# Altium PCB pyboardCN_V2.PcbDoc
Units mil, origin at the board's own origin, x right, y up, seen from the top; angles counter-clockwise.
Board outline 2125.98 x 1732.28 mil, 2 copper layers (Top Layer, Bottom Layer); 62 components, 71 nets, 312 pads, 93 vias.
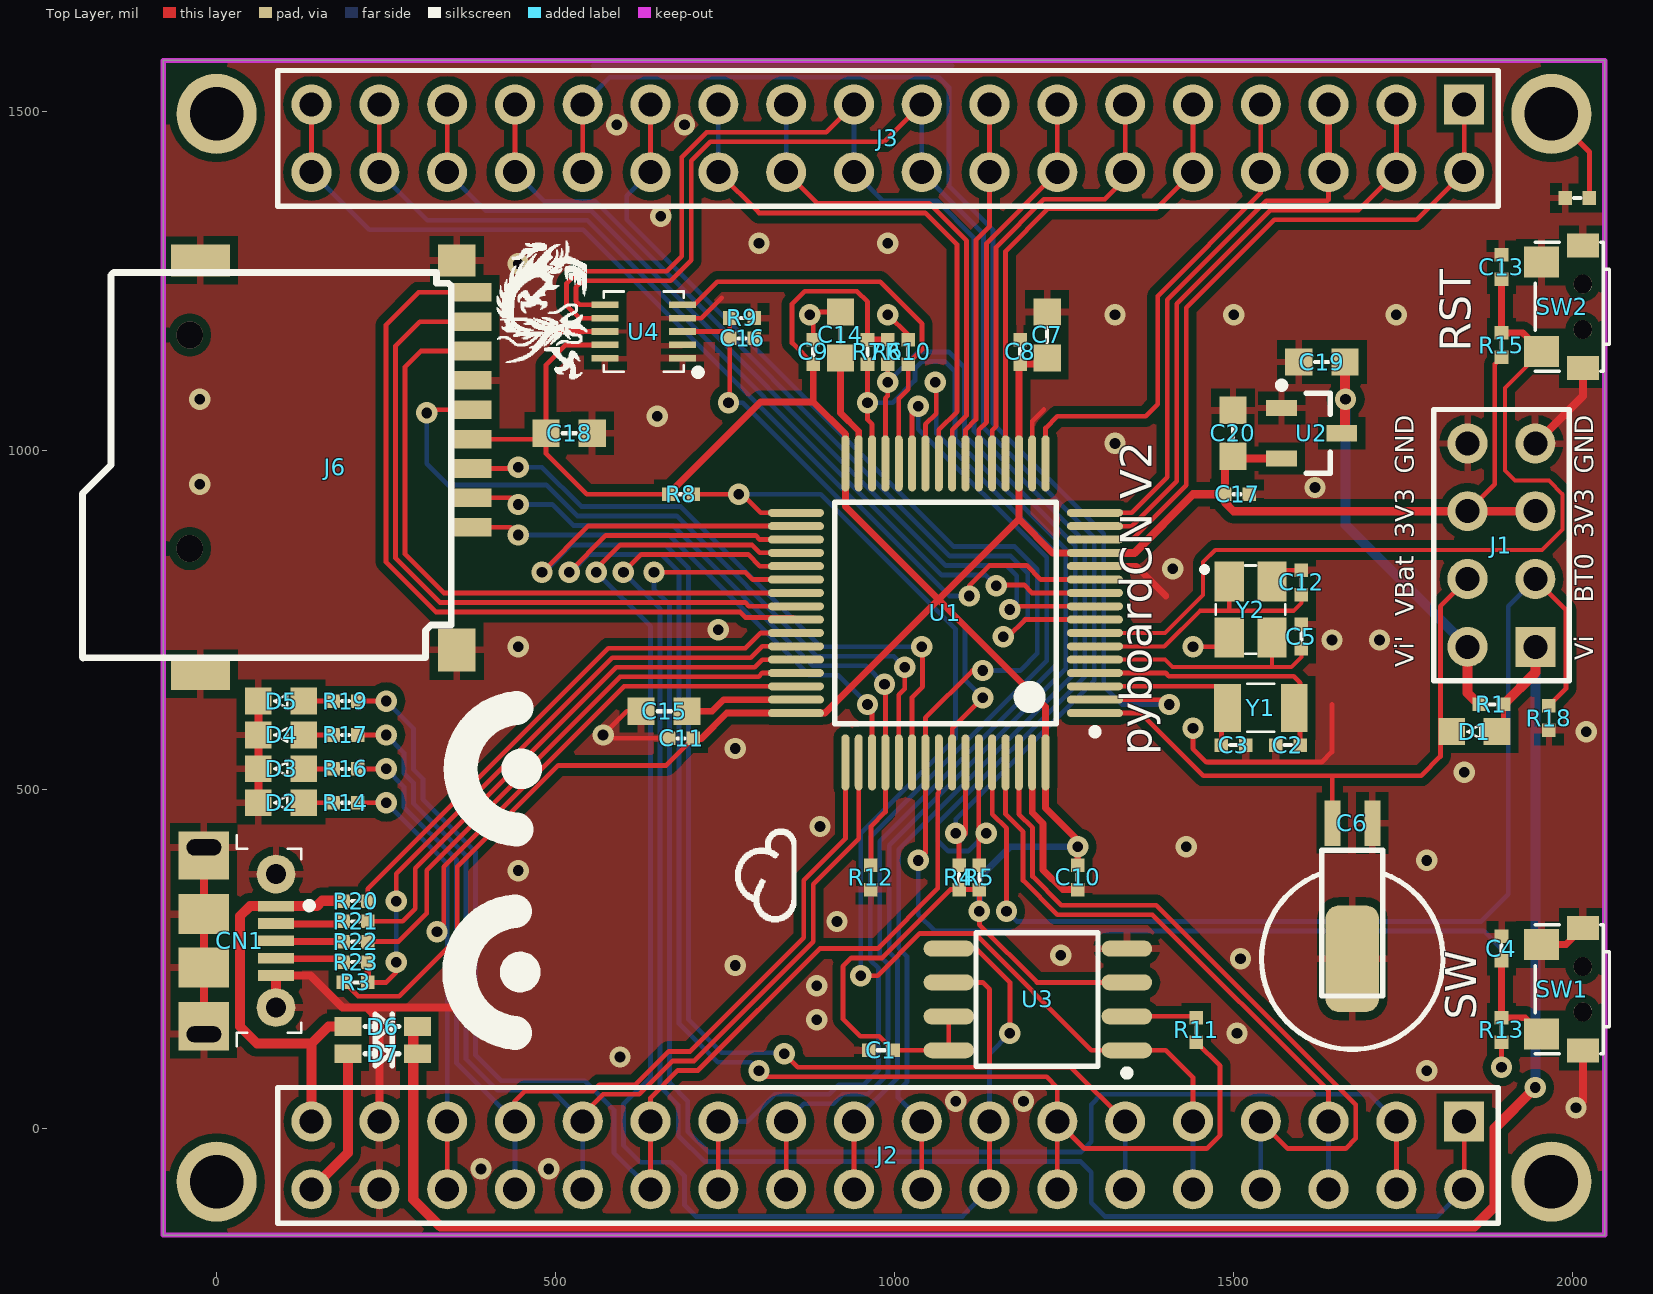
[diagram p0: Top Layer view]
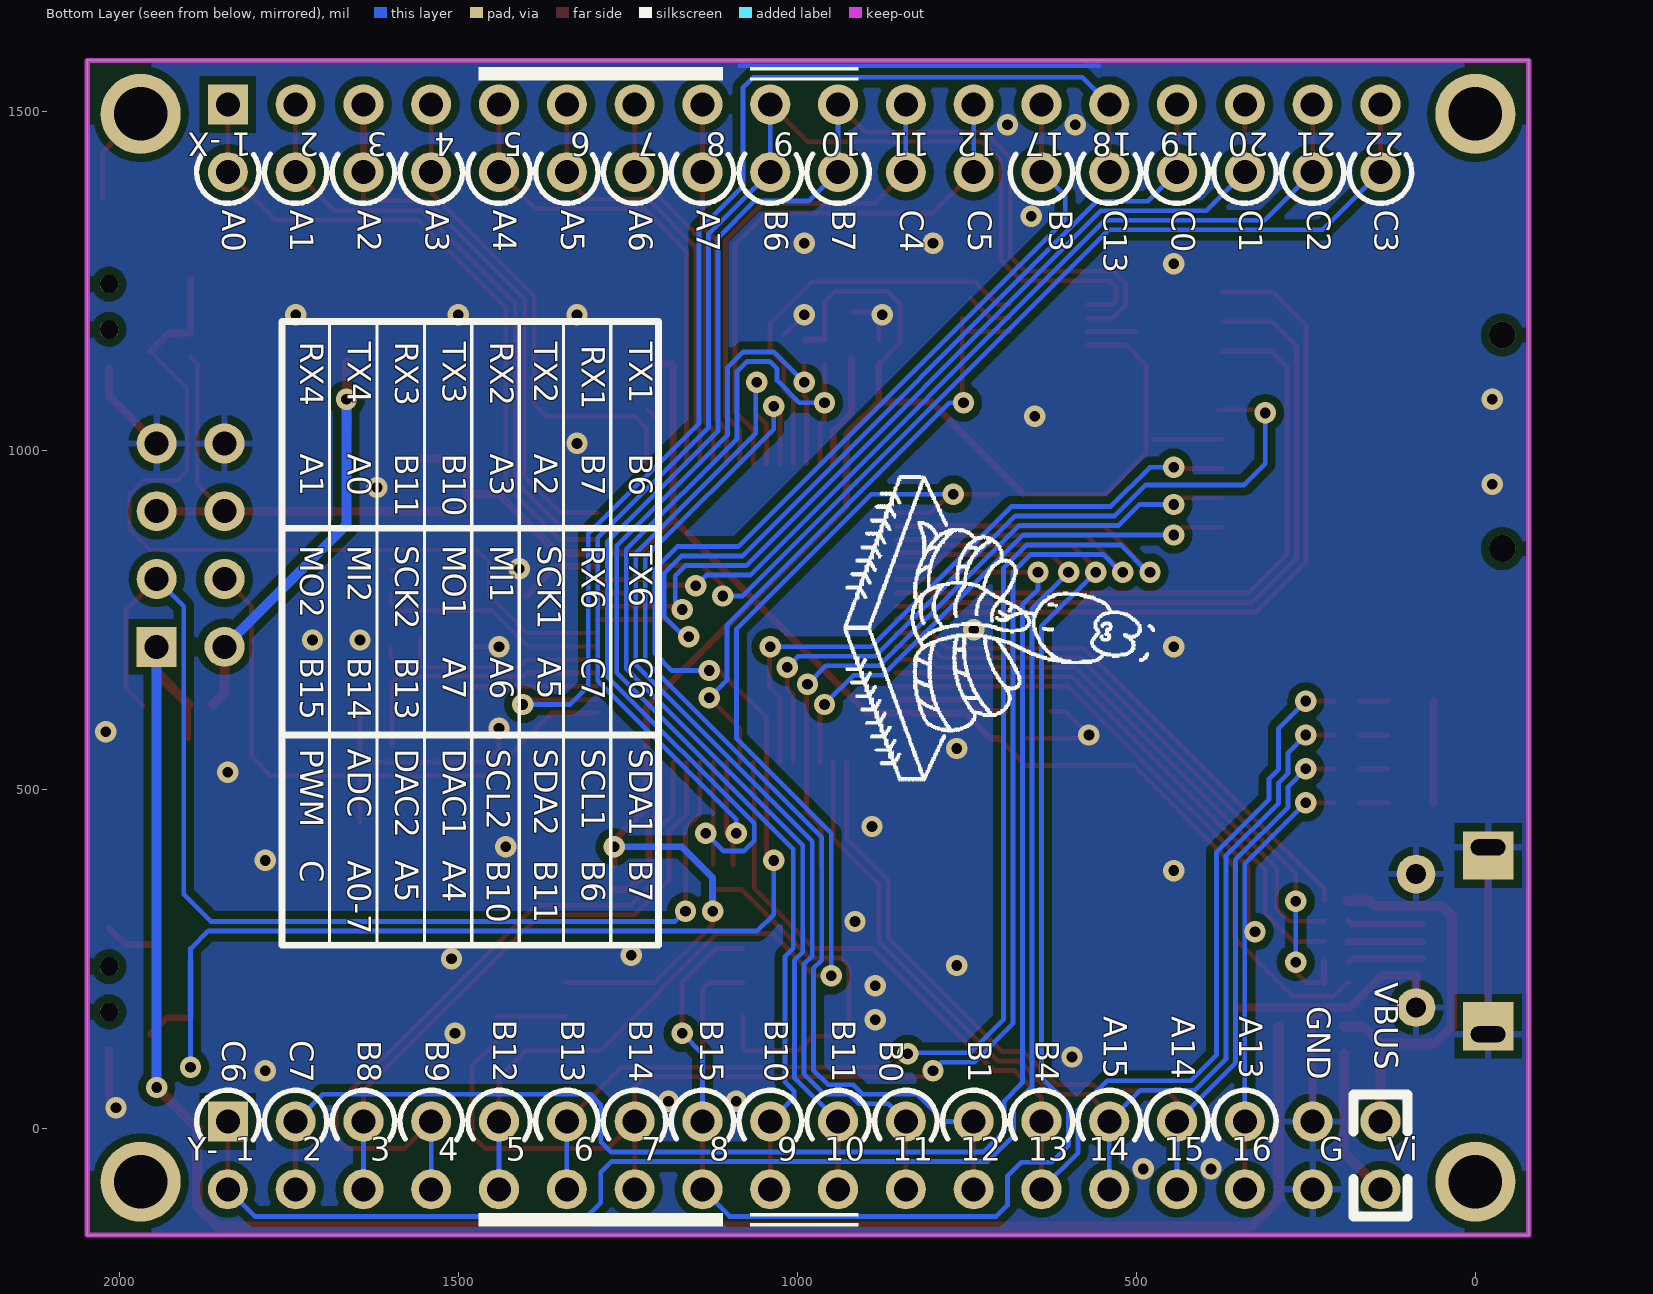
[diagram p1: Bottom Layer view, seen from below]

## Layer stack, top to bottom
Top Layer: signal copper 1.4
Dielectric: dielectric 12.6, FR-4, Dk 4.8
Bottom Layer: signal copper 1.4

## Board outline
-78.74,-157.48 -78.74,1574.8 2047.24,1574.8 2047.24,-157.48

## Design rules (kind name [scope] priority, off if disabled: settings)
Clearance Clearance_keepout [OnLayer('Keep-Out Layer')] p1: gap=0
Clearance Clearance_polygon [InPolygon] p2: gap=12
Clearance [All] p3: gap=7
ComponentClearance [All] p1 off: gap=10 collisioncheckmode=3 verticalgap=10 showdistances=FALSE
MinimumSolderMaskSliver [All] p1 off: minsoldermaskwidth=10
NetAntennae [All] p1 off: netantennaetolerance=0
PolygonConnect PolygonConnect_via [IsVia] p1: connectstyle=Direct reliefconductorwidth=10 reliefentries=4 polygonreliefangle="90 Angle"
PolygonConnect [All] p2: connectstyle=Relief reliefconductorwidth=10 reliefentries=4 polygonreliefangle="90 Angle"
RoomDefinition 电源 [InComponentClass('电源')] p1: confinementstyle=ConfineIn formatcopy=TRUE lockcomponents=FA outline 1795,1280 -170,1280 -170,20 1795,20
RoomDefinition 接口 [InComponentClass('接口')] p2: confinementstyle=ConfineIn formatcopy=TRUE lockcomponents=FA outline 2015,1635 35,1635 35,-210 2015,-210
RoomDefinition STM32F405 [InComponentClass('STM32F405')] p3: confinementstyle=ConfineIn formatcopy=TRUE lockcomponents=FALSE outline 2110,1605 -150,1605 -150,-180 2110,-180
RoomDefinition "micro SD" [InComponentClass('micro SD')] p4: confinementstyle=ConfineIn formatcopy=TRUE lockcomponents=FALSE outline 595,1356.06 -209.17,1356.06 -209.17,571.18 595,571.18
RoutingVias [All] p1: holewidth=28 width=50 viastyle="Through Hole" minholewidth=15.75 minwidth=31.5 maxholewidth=28 maxwidth=50
SilkscreenOverComponentPads [All] p1 off: minsilkscreentomaskgap=10
SolderMaskExpansion [All] p1 off: expansion=4
Width [All] p1: maxlimit=30 minlimit=6 preferedwidth=10
24 further rules are at their usual default settings.

## Classes and differential pairs
component class "micro SD": C18 J6
component class STM32F405: C1 C2 C3 C4 C5 C6 C7 C8 C9 C10 C11 C12 C13 C14 C15 C16 C17 D1 D2 D3 D4 D5 R3 R4 R5 R6 R7 R8 R9 R10 R11 R12 R13 R14 R15 R16 R17 R18 R19 SW1 SW2 U1 U3 U4 Y1 Y2
component class 接口: D7 J1 J2 J3 R1
component class 电源: C19 C20 CN1 D6 R20 R21 R22 R23 U2

## Components (designator, comment, footprint, x,y, rotation, side; value= is the part's Value field where it differs from the comment)
C1 "104" SMD0402 980,115 r0 top
C2 "2.2p" SMD0402 1580,565 r0 top
C3 "2.2p" SMD0402 1500,565 r180 top
C4 "104" SMD0402 1895,265 r270 top
C5 "18p" SMD0402 1600,725 r270 top
C6 "0.22F" DMS3R3224R 1675,250 r0 top
C7 "2u2" SMD0603 1225,1170 r270 top
C8 "104" SMD0402 1185,1145 r270 top
C9 "104" SMD0402 880,1145 r270 top
C10 "104" SMD0402 1270,370 r90 top
C11 "104" SMD0402 685,575 r0 top
C12 "18p" SMD0402 1600,805 r270 top
C13 "104" SMD0402 1895,1270 r270 top
C14 "2u2" SMD0603 920,1170 r270 top
C15 "2u2" SMD0603 660,615 r0 top
C16 "104" SMD0402 775,1165 r180 top
C17 "104" SMD0402 1505,935 r180 top
C18 "2u2" SMD0603 520,1025 r180 top
C19 "2u2" SMD0603 1630,1130 r0 top
C20 "2u2" SMD0603 1499,1025 r270 top
CN1 "1050170001" MOLEX_1050170001 87.56,276.43 r270 top
D1 "LED RED" LED_0603_RED 1855,585 r90 top
D2 "LED RED" LED_0603_RED 95,480 r90 top
D3 "LED GREEN" LED_0603_GREEN 95,530 r90 top
D4 "LED Yellow" LED_0603_YELLOW 95,580 r90 top
D5 "LED Blue" LED_0603_BLUE 95,630 r90 top
D6 "SS5819WS" 1N5819-SOD323 245,150 r0 top
D7 "SS5819WS" 1N5819-SOD323 245,110 r0 top
J1 "" HDR2X4 1945,710 r90 top
J2 "Header 18X2" HDR2X18 1840,10 r180 top
J3 "Header 18X2" HDR2X18 1840,1510 r180 top
J6 "microSD PUSH-PULL" microSD-1 175,975 r180 top
R1 "1" SMD0402 1880,625 r180 top
R3 "100k" SMD0402 205,215 r0 top
R4 "10k" SMD0402 1095,370 r90 top
R5 "10k" SMD0402 1125,370 r90 top
R6 "10k" SMD0402 990,1145 r270 top
R7 "10k" SMD0402 960,1145 r270 top
R8 "10k" SMD0402 685,935 r0 top
R9 "10k" SMD0402 775,1195 r0 top
R10 "10k" SMD0402 1020,1145 r90 top
R11 "470" SMD0402 1445,145 r270 top
R12 "10M" SMD0402 965,370 r270 top
R13 "10k" SMD0402 1895,145 r270 top
R14 "1k" SMD0402 190,480 r180 top
R15 "10k" SMD0402 1895,1155 r270 top
R16 "1k" SMD0402 190,530 r180 top
R17 "1k" SMD0402 190,580 r180 top
R18 "100k" SMD0402 1965,605 r90 top
R19 "1k" SMD0402 190,630 r180 top
R20 "560" SMD0402 205,335 r180 top
R21 "22R" SMD0402 205,305 r180 top
R22 "22R" SMD0402 205,275 r180 top
R23 "560" SMD0402 205,245 r180 top
SW1 "USR" SWPB_2x4_L 2015,205 r270 top
SW2 "RST" SWPB_2x4_L 2015,1211.54 r270 top
U1 "STM32F405RGT6" LQFP64_M 1075,760 r180 top
U2 "XC6206P332MR" SOT-23_N 1615,1025 r0 top
U3 "W25Q64" SO8_L 1250,190 r180 top
U4 "MMA7660FC" MMA7660 630,1175 r180 top
Y1 "32K" TXC_9H03200019 1540,620 r180 top
Y2 "8M" SMD3225 1525,765 r270 top

## Footprints (in the part's own frame and the unit in brackets; to place one, negate y for a bottom-side part, rotate by r counter-clockwise, add the part's x,y. Pads: shape width x height; smd on the part's side, far side on the other; paste and mask are expansions set on the pad)
1N5819-SOD323 [mm]
  rect 1x0.7 smd: 1(-1.3,0) 2(1.3,0)
  silkscreen extent -0.66,-0.46 0.61,0.46, body extent -1.3,-0.63 1.3,0.63, height 0.85
DMS3R3224R [mm]
  rect 0.6x1.7 smd: 1(-0.75,5.08) 2(0.75,5.08)
  silkscreen extent -3.4,-3.4 3.4,4.06, body extent -3.27,-3.29 3.3,5.6, height 1.6
HDR2X4 [mm] "Connector; Header; 4"
  rect 1.5x1.5 hole 0.9: 1(0,0)
  round 1.5 hole 0.9: 2(0,2.54) 3(2.54,0) 4(2.54,2.54) 5(5.08,0) 6(5.08,2.54) 7(7.62,0) 8(7.62,2.54)
  silkscreen extent -1.27,-1.27 8.89,3.81
HDR2X18 [mm] "Connector; Header; 18x2 P"
  rect 1.5x1.5 hole 0.9: 1(0,0)
  round 1.5 hole 0.9: 2(0,2.54) 3(2.54,0) 4(2.54,2.54) 5(5.08,0) 6(5.08,2.54) 7(7.62,0) 8(7.62,2.54) 9(10.16,0) 10(10.16,2.54) 11(12.7,0) 12(12.7,2.54) 13(15.24,0) 14(15.24,2.54) 15(17.78,0) 16(17.78,2.54) 17(20.32,0) 18(20.32,2.54) 19(22.86,0) 20(22.86,2.54) 21(25.4,0) 22(25.4,2.54) 23(27.94,0) 24(27.94,2.54) 25(30.48,0) 26(30.48,2.54) 27(33.02,0) 28(33.02,2.54) 29(35.56,0) 30(35.56,2.54) 31(38.1,0) 32(38.1,2.54) 33(40.64,0) 34(40.64,2.54) 35(43.18,0) 36(43.18,2.54)
  silkscreen extent -1.27,-1.27 44.45,3.81
LED_0603_BLUE [mm]
  rect 1x1 smd paste+0 mask+0: 1(0,-0.85) 2(0,0.85)
  silkscreen extent -0.25,-0.23 0.25,0.25, body extent -0.38,-0.76 0.38,0.76, height 0.8
LED_0603_GREEN [mm]
  rect 1x1 smd paste+0 mask+0: 1(0,-0.85) 2(0,0.85)
  silkscreen extent -0.25,-0.23 0.25,0.25, body extent -0.38,-0.76 0.38,0.76, height 0.8
LED_0603_RED [mm]
  rect 1x1 smd paste+0 mask+0: 1(0,-0.85) 2(0,0.85)
  silkscreen extent -0.25,-0.23 0.25,0.25, body extent -0.38,-0.76 0.38,0.76, height 0.8
LED_0603_YELLOW [mm]
  rect 1x1 smd paste+0 mask+0: 1(0,-0.85) 2(0,0.85)
  silkscreen extent -0.25,-0.23 0.25,0.25, body extent -0.38,-0.76 0.38,0.76, height 0.8
LQFP64_M [mm] "Thin QFP, 64-Leads, Body 10x10mm, Pitch 0.5mm, IPC Low Density"
  oval 2.1x0.3 smd: 1(-5.6,3.75) 2(-5.6,3.25) 3(-5.6,2.75) 4(-5.6,2.25) 5(-5.6,1.75) 6(-5.6,1.25) 7(-5.6,0.75) 8(-5.6,0.25) 9(-5.6,-0.25) 10(-5.6,-0.75) 11(-5.6,-1.25) 12(-5.6,-1.75) 13(-5.6,-2.25) 14(-5.6,-2.75) 15(-5.6,-3.25) 16(-5.6,-3.75) 33(5.6,-3.75) 34(5.6,-3.25) 35(5.6,-2.75) 36(5.6,-2.25) 37(5.6,-1.75) 38(5.6,-1.25) 39(5.6,-0.75) 40(5.6,-0.25) 41(5.6,0.25) 42(5.6,0.75) 43(5.6,1.25) 44(5.6,1.75) 45(5.6,2.25) 46(5.6,2.75) 47(5.6,3.25) 48(5.6,3.75)
  oval 0.3x2.1 smd: 17(-3.75,-5.6) 18(-3.25,-5.6) 19(-2.75,-5.6) 20(-2.25,-5.6) 21(-1.75,-5.6) 22(-1.25,-5.6) 23(-0.75,-5.6) 24(-0.25,-5.6) 25(0.25,-5.6) 26(0.75,-5.6) 27(1.25,-5.6) 28(1.75,-5.6) 29(2.25,-5.6) 30(2.75,-5.6) 31(3.25,-5.6) 32(3.75,-5.6) 49(3.75,5.6) 50(3.25,5.6) 51(2.75,5.6) 52(2.25,5.6) 53(1.75,5.6) 54(1.25,5.6) 55(0.75,5.6) 56(0.25,5.6) 57(-0.25,5.6) 58(-0.75,5.6) 59(-1.25,5.6) 60(-1.75,5.6) 61(-2.25,5.6) 62(-2.75,5.6) 63(-3.25,5.6) 64(-3.75,5.6)
  silkscreen extent -5.72,-4.15 4.15,4.57, body extent -5,-5 5,5, height 1.6
microSD-1 [mm]
  rect 1.6x0.7 smd: 1(-5.05,2.25) 2(-5.05,1.15) 3(-5.05,0.05) 4(-5.05,-1.05) 5(-5.05,-2.15) 6(-5.05,-3.25) 7(-5.05,-4.35) 8(-5.05,-5.45) 9(-5.05,-6.55)
  rect 1.4x1.2 smd: GP1(-4.55,-7.75)
  rect 2.2x1.2 smd: GP2(5.05,-7.75) GP3(5.05,7.75)
  rect 1.4x1.6 smd: GP4(-4.55,6.85)
  silkscreen extent -4.35,-7.29 9.47,7.15
MMA7660 [mm]
  rect 1x0.25 smd: 1(-1.45,1) 2(-1.45,0.5) 3(-1.45,0) 4(-1.45,-0.5) 5(-1.45,-1) 6(1.45,-1) 7(1.45,-0.5) 8(1.45,0) 9(1.45,0.5) 10(1.45,1)
  silkscreen extent -2.16,-1.5 1.5,1.65, body extent -1.52,-1.52 1.52,1.52, height 0.9
MOLEX_1050170001 [mm] "USB Micr"
  rect 0.4x1.35 smd: 1(-1.3,0) 2(-0.65,0) 3(0,0) 4(0.65,0) 5(1.3,0)
  round 1.45 hole 0.75: 6(-2.5,0) 11(2.5,0)
  rect 1.8x1.9 hole 0.6 slot 1.3 at 90 deg copper offset 0.3,0: 7(-3.5,-2.7)
  rect 1.5x1.9 smd: 8(-1,-2.7) 9(1,-2.7)
  rect 1.8x1.9 hole 0.6 slot 1.3 at 90 deg copper offset -0.3,0: 10(3.5,-2.7)
  silkscreen extent -3.95,-1.46 3.95,1.37, body extent -4.1,-5.21 4.1,0.19, height 2.58
SMD0402 [mil]
  rect 20x20 smd: 1(-18,0) 2(18,0)
  silkscreen extent -5,0 5,0, body extent -20,-10 20,10, height 14
SMD0603 [mil]
  rect 40x40 smd: 1(-34,0) 2(34,0)
  silkscreen extent -10,0 10,0, body extent -40,-20 40,20, height 20
SMD3225 [mm] "Crystal SMD 3.2x2.5mm compatible with 2.5x2.0mm"
  rect 1.5x1.1 smd mask+0.05: 1(-1.05,-0.8) 2(1.05,-0.8) 3(1.05,0.8) 4(-1.05,0.8)
  silkscreen extent -1.65,-1.82 1.65,1.3, body extent -1.65,-1.3 1.65,1.3, height 1
SO8_L [mm] "SOIC, 8-Leads, Body 4.9x3.9mm, Pitch 1.27mm, IPC High Density"
  oval 1.9x0.6 smd: 1(-2.35,1.905) 2(-2.35,0.635) 3(-2.35,-0.635) 4(-2.35,-1.905) 5(4.318,-1.905) 6(4.318,-0.635) 7(4.318,0.635) 8(4.318,1.905)
  silkscreen extent -2.48,-2.5 3.3,2.88, body extent -2,-2.54 3.94,2.54, height 1.75
SOT-23_N [mm] "SOT23, 3-Leads, Body 2.9x1.3mm, Pitch 0.95mm, Lead Span 2.3mm, IPC M"
  rect 1.15x0.6 smd: 1(-1.125,0.95) 2(-1.125,-0.95) 3(1.125,0)
  silkscreen extent -1.25,-1.5 0.7,1.92, body extent -0.7,-1.5 0.7,1.5, height 1.11
SWPB_2x4_L [mm]
  rect 1.15x1.3 smd: 1(-1.675,-1.55) 2(1.675,-1.55)
  rect 0.9x1.2 smd: ""(-2.3,0) ""(2.3,0)
  round 0.7 hole 0.7: ""(-0.85,0) ""(0.85,0)
  silkscreen extent -2.41,-1.78 2.41,1
TXC_9H03200019 [mm]
  rect 1x1.8 smd: 1(-1.25,0) 2(1.25,0)
  silkscreen extent -0.5,-0.9 0.5,0.9, body extent -1.73,-0.85 1.73,0.85, height 0.8

## Part data
C1 C2 C3 C4 C5 C6 C7 C8 C9 C10 C11 C12 C13 C14 C15 C16 C17 C18: library part Cap
D1 D2: library part LED-RED, "红?"
D3: library part LED-GREEN, "绿?"
D4: library part LED-YELLOW, "黄?"
D5: library part LED-BLUE, "蓝?"
J1: library part "Header 4X2", "Header, 4-Pin, Dual row"
J2 J3: "Header, 18-Pin, Dual row"
R3 R4 R5 R6 R7 R8 R9 R10 R11 R12 R13 R14 R15 R16 R17 R18 R19: library part Res
SW1 SW2: library part SW-PB, "Switch"
U2: library part XC6206
U3: library part N25Q128A13EF840E, "128Mb, 3V, Multiple I/O Serial Flash Memory, Quad/Dual"
U4: library part MMA7660
Y1: library part XTAL
Y2: library part XTAL_SMD

## Free pads (board coordinates)
  rrect50% 78.74x157.48 smd: 0(1675,250)
  round 118.11 hole 78.74: 1(0,-78.74) 2(1968.5,-78.74) 3(1968.5,1496.06) 4(0,1496.06)
  rect 20x20 smd: 1(2024.75,1372) 2(1988.75,1372)

## Via types
v1: diameter 31.5, hole 15.75, Top Layer to Bottom Layer, 91 vias
v2: diameter 39.37, hole 39.37, Top Layer to Bottom Layer, 2 vias

## Nets (pads, with @x,y where several pads share a name; then routed paths per layer and width w, separated by ;. In a path a pad name is that pad's centre, name@x,y a point inside that pad or via, vN(x,y) a via of type N, cw(c..) or ccw(c..) an arc to the next point about the centre after c; other vN are vias at no path point)
3V3: C1.2 C7.2 C8.2 C9.2 C10.2 C11.2 C17.2 C18.2 C20.2 J1.5 J1.6 J6.4 R3.1 R4.1 R5.1 R6.1 R7.1 R8.1 R15.2 U1.13 U1.19 U1.32 U1.48 U1.64 U2.2 U3.3 U3.7 U3.8 U4.9 | length 5901
  Top Layer w7: R3.1 188.15,215 208.65,194.5 269.5,194.5 355,280 355,386.01 503.99,535 663,535 C11.2 ; J6.4 C18.2@475.34,1016.34 ; U4.9 515.31,1155.32 486,1126 486,1015 486,995 546,935 R8.1 ; C9.2 848.75,1158.25 848.75,1215.87 867.38,1234.5 944.35,1234.5 960,1218.85 R7.1 ; U3.7 U3.8 C1.2 977.5,135.5 949.5,135.5 923.75,161.25 923.75,238.75 936.25,251.25 960.87,251.25 961.12,251 981.2,251 1082.2,352 R4.1 R5.1 v1(1125,320) 1125,300 1210,215 U3.3 ; J1.6 1885.03,950.03 1885.03,1026.58 ; 1885,1026.61 1885,1127 R15.2
  Top Layer w10: R8.1 667,935.97 801.99,1070.96 880,1070.96 ; C11.2 715,575 752.36,612.36 U1.48 897.36,612.36 1183.27,898.27 ; C9.2 880,1070.96 ; R7.1 R6.1 ; C8.2@1183.27,1123.73 U1.19 1183.27,898.27 ; C8.2 C7.2@1216,1127 ; C10.2 v1(1270,415) 1270,425 1222.64,472.36 U1.64 1222.64,621.6 927.36,916.88 U1.32 927.36,1023.6 880,1070.96 ; U1.13 1232.95,848.58 1183.27,898.27
  Top Layer w12: U1.13 1353.58,848.58 1440,935 C17.2 ; C20.2@1487,979 C17.2 ; C20.2@1502.4,987.6 U2.2 ; J1.5 J1.6 1500,910 1487,923 C17.2
  Bottom Layer w10: v1(1125,320) 1125,370 1170,415 v1(1270,415)
BOOT0-P1: J1.3 R18.2 U1.60 | length 1688.6
  Top Layer w7: U1.60 1143.9,463.22 1165,442.12 v1(1165,320) ; J1.3 1990,765 1990,648 R18.2
  Bottom Layer w7: v1(1165,320) 1180,305 1865,305 1904.97,344.97 1904.97,769.97 J1.3
DM: CN1.2 R21.2 | length 111.8
  Top Layer w10: CN1.2@77.56,301.02 183.15,301.02 R21.2@187.56,305.43
DP: CN1.3 R22.2 | length 110
  Top Layer w10: CN1.3@77.56,275.43 R22.2@187.56,275.43
GND: C1.1 C2.1 C3.1 C4.1 C5.1 C6.2 C7.1 C8.1 C9.1 C10.1 C11.1 C12.1 C13.1 C14.1 C15.1 C16.1 C17.1 C18.1 C19.1 C20.1 CN1.5 CN1.6 CN1.7 CN1.8 CN1.9 CN1.10 CN1.11 D2.2 D3.2 D4.2 D5.2 J1.7 J1.8 J2.33 J2.34 J6.6 J6.GP1 J6.GP2 J6.GP3 J6.GP4 pad.0 pad.2@1988.75,1372 R9.2 R10.2 R12.2 R18.1 SW1.1 SW1.@2015,114.45 SW1.@2015,295.55 SW2.1 SW2.@2015,1120.98 SW2.@2015,1302.09 U1.12 U1.18 U1.63 U2.1 U3.4 U4.1 U4.2 U4.4 U4.8 U4.10 Y2.2 Y2.4 | length 2989.2
  Top Layer w7: 500,1175 U4.8 ; v1(570,580) 605,615 C15.1 ; v1@575,575 C11.1 ; U4.4 714.68,1194.68 745,1225 ; v1@879,1204 C14.1 ; C9.1 v1@880,1195 ; v1(990,1200) R10.2@1020,1170 ; U1.18 1202.95,1042.95 1220,1060 ; v1(1440,590) 1440,559.59 1459.59,540 1630,540 1645,555 1645,625 ; v1(1440,710) Y2.2@1479.84,710 ; Y2.4@1573.16,823 C12.1
  Top Layer w10: U1.63 1202.95,465.69 1219,449.64 1219,381 1248,352 C10.1 ; U1.12 1356.1,828.9 1400,785 ; SW1.1 1990.39,270.94 SW1.@2015,295.55
  Top Layer w12: CN1.10 CN1.9 CN1.8 CN1.7 ; D2.2 D3.2 D4.2 D5.2 ; CN1.5 138.36,225.25 185.62,178 222,178 ; J2.33 240,160 222,178 ; 348,178 222,178 ; J1.7 2015,1080 SW2.@2015,1120.98 ; v1@2015,40 SW1.@2015,114.45
  Top Layer w15: CN1.11 CN1.5
  Bottom Layer w7: 555,1567.1 1085,1567.1
  other v1: 390,-60 490,-60 2005,30 1090,40 1190,40 1785,85 595,105 1505,140 885,160 885,210 765,240 1510,250 1245,255 915,305 445,380 1785,395 1430,415 890,445 1840,525 765,560 2020,585 445,710 1645,720 1715,720 740,735 1410,825 1620,945 -25,950 1325,1010 650,1050 -25,1075 875,1200 1325,1200 1500,1200 1740,1200 445,1275 800,1305 990,1305 655,1345 590,1480 690,1480
ID: CN1.4 R23.2 | length 111.4
  Top Layer w10: CN1.4@77.56,249.84 182.16,249.84 R23.2
NetC2_2: C2.2 U1.4 Y1.1 | length 400.5
  Top Layer w7: U1.4 1399.49,671.42 1404.41,666.5 1588.5,666.5 1598,657 C2.2
NetC3_2: C3.2 U1.3 Y1.2 | length 268.1
  Top Layer w7: U1.3 1473.27,651.73 1482,643 C3.2
NetC4_2: C4.2 R13.1 SW1.2 | length 152.9
  Top Layer w10: C4.2 R13.1 1930.03,163 SW1.2
NetC5_2: C5.2 U1.5 Y2.3 | length 374.5
  Top Layer w6: U1.5 1398.9,691.1 1410,680 1585,680 1600,695 C5.2@1600,712 ; 1556.5,681.5 Y2.3
NetC12_2: C12.2 U1.6 Y2.1 | length 384.8
  Top Layer w6: U1.6 1397.66,710.79 1450.06,763.19 1588.19,763.19 1600,775 C12.2 ; 1493.5,764.69 Y2.1
NetC14_2: C14.2 U1.31 | length 166.7
  Top Layer w10: C14.2 920,1055 947.05,1027.95 U1.31
NetC15_2: C15.2 U1.47 | length 167.6
  Top Layer w10: C15.2 730.96,615 748.01,632.05 U1.47
NetD2_1: D2.1 R14.2 | length 43.5
  Top Layer w7: D2.1 R14.2
NetD3_1: D3.1 R16.2 | length 43.5
  Top Layer w7: D3.1 R16.2
NetD4_1: D4.1 R17.2 | length 43.5
  Top Layer w7: D4.1 R17.2
NetD5_1: D5.1 R19.2 | length 43.5
  Top Layer w7: D5.1 R19.2
NetR11_1: R11.1 U3.2 | length 100.5
  Top Layer w7: U3.2 R11.1@1443,165
PA0-X1: J3.1 J3.2 U1.14 | length 1022.2
  Top Layer w7: U1.14 1349.93,868.27 1430,948.33 1430,1210 1560,1340 1770,1340 J3.2 J3.1
PA1-X2: J3.3 J3.4 U1.15 | length 914
  Top Layer w7: U1.15 1349.82,887.95 1416,954.13 1416,1215.8 1554.2,1354 1684,1354 J3.4 J3.3
PA2-X3: J3.5 J3.6 U1.16 | length 829.6
  Top Layer w7: U1.16 1349.71,907.64 1402,959.93 1402,1221.6 1548.4,1368 1638.4,1368 1640,1369.6 J3.6
  Top Layer w10: J3.6 J3.5
PA3-X4: J3.7 J3.8 U1.17 | length 737.1
  Top Layer w7: U1.17 1222.64,1032.64 1240,1050 1370,1050 1388,1068 1388,1227.4 1540,1379.4 J3.8 J3.7
PA4-X5: J3.9 J3.10 U1.20 | length 737.7
  Top Layer w7: U1.20 1163.58,1293.58 1225.97,1355.97 1385.97,1355.97 J3.10 J3.9
PA5-X6: J3.11 J3.12 U1.21 | length 653.3
  Top Layer w7: U1.21 1143.9,1029.7 1149.58,1035.39 1149.58,1299.38 1220.17,1369.97 1310.17,1369.97 J3.12@1340,1399.8 ; J3.12 J3.11
PA6-X7: J3.13 J3.14 U1.22 | length 577.5
  Top Layer w7: U1.22 1124.21,1029.82 1135.58,1041.19 1135.58,1305.18 1240,1409.6 J3.14 J3.13
PA7-X8: J3.15 J3.16 U1.23 | length 544.2
  Top Layer w7: U1.23 1104.53,1029.93 1120,1045.4 1120,1310 1140,1330 J3.16 J3.15
PA8-SDIO_SW: J6.9 U1.41 | length 1133.3
  Top Layer w7: J6.9 297.87,1232.87 250,1185 250,835 323.47,761.53 771.91,761.53 780,753.44 851.25,753.44 U1.41
PA9-VBUS: R20.1 U1.42 | length 805.9
  Top Layer w7: R20.1 223,353 577.73,707.73 780,707.73 802.74,730.47 U1.42
PA10-ID: R3.2 R23.1 U1.43 | length 951.9
  Top Layer w7: R3.2 250,215 265,230 v1(265,245) ; v1(265,335) 265,375.2 583.53,693.73 787.72,693.73 804.77,710.79 U1.43
  Top Layer w10: R3.2 R23.1
  Bottom Layer w7: v1(265,245) v1(265,335)
PA11-DM: R21.1 U1.44 | length 825.7
  Top Layer w7: R21.1@223.56,305.43 274.67,305.43 293,323.76 293,383.4 589.33,679.73 793.52,679.73 804.89,691.1 U1.44
PA12-DP: R22.1 U1.45 | length 832.4
  Top Layer w7: R22.1@223.56,275.43 268.72,275.43 310,316.72 310,380.6 595.13,665.73 799.31,665.73 805,671.42 U1.45
PA13-RED-P5: J2.31 J2.32 R14.1 U1.46 | length 1400.1
  Top Layer w7: R14.1 v1(250,480) ; J2.31@325,25 J2.31 J2.32 ; v1(325,290) 335,300 335,385.8 600.93,651.73 U1.46
  Bottom Layer w7: v1(250,480) 340,390 J2.31
PA14-GRN-P4: J2.29 J2.30 R16.1 U1.49 | length 1580.6
  Top Layer w7: R16.1 v1(250,530) ; J2.29 440,40 455,55 555.2,55 564.2,64 617.59,64 666.84,113.25 698.4,113.25 866,280.85 866,365.8 927.36,427.16 U1.49
  Bottom Layer w7: v1(250,530) 276.25,503.75 276.25,473.55 354,395.8 354,96 J2.29 J2.30
PA15-YEL-P3: J2.27 J2.28 R17.1 U1.50 | length 1627
  Top Layer w7: R17.1 v1(250,580) ; J2.27 540,20 570,50 623.39,50 672.64,99.25 704.2,99.25 880,275.05 880,360 947.05,427.05 U1.50
  Bottom Layer w7: v1(250,580) 276.25,553.75 276.25,523.55 290.25,509.55 290.25,479.35 368,401.6 368,101.8 413.8,56 494,56 J2.27 J2.28
PB0-Y11: J2.21 J2.22 U1.26 | length 1612.5
  Top Layer w7: J2.22 J2.21 ; U1.26 1045.47,1038.35 1061.25,1054.13 1061.25,1098.75 v1(1060,1100)
  Bottom Layer w7: J2.21 866.03,36.03 909.42,36.03 923.42,50.03 960.23,50.03 990.25,80.05 990.25,241.67 978,253.92 978,423.2 1238.25,683.45 1238.25,847.76 1061.25,1024.76 1061.25,1098.75 v1(1060,1100)
PB1-Y12: J2.23 J2.24 U1.27 | length 1626.4
  Top Layer w7: J2.24 J2.23 ; U1.27 1025.79,1055.79 v1(1035,1065)
  Bottom Layer w7: J2.23 783.39,10 823.42,50.03 903.62,50.03 917.62,64.03 954.43,64.03 976.25,85.85 976.25,235.87 964,248.12 964,429 1224.25,689.25 1224.25,841.96 1035,1031.21 v1(1035,1065)
PB2-BOOT1: R10.1 U1.28 U4.5 | length 613.6
  Top Layer w7: U4.5 704.37,1214.37 738.5,1248.5 978.62,1248.5 1040.5,1186.62 1040.5,1148.65 1020,1128.15 R10.1 1020,1090 1006.1,1076.1 U1.28
PB3-SW-X17: J3.25 J3.26 R13.2 U1.55 | length 2719.1
  Top Layer w7: J3.26 J3.25 ; v1(1035,395) 1045.47,405.47 U1.55 1045.47,605.47 1115,675 v1(1130,675) ; v1(1895,90) R13.2
  Bottom Layer w7: J3.26 605,1375 605,1340 1087.2,857.8 1177,857.8 1210.25,824.55 1210.25,700.25 1185,675 v1(1130,675) ; v1(1035,395) 1035,315 1059,291 1869,291 1895,265 v1(1895,90)
PB4-BLU-P2: J2.25 J2.26 R19.1 U1.56 | length 1869
  Top Layer w7: R19.1 v1(250,630) ; J2.26 J2.25 640,45 680.25,85.25 710,85.25 890,265.25 966.67,265.25 966.92,265 975,265 1063.75,353.75 1063.75,493.59 1065.16,495 U1.56
  Bottom Layer w7: v1(250,630) 290.25,589.75 290.25,529.35 304.25,515.35 304.25,485.15 382,407.4 382,107.6 419.6,70 543,70 585.97,27.03 585.97,-35.97 J2.26
PB5-MMA_AVDD: C16.2 R9.1 U1.57 U4.3 | length 907.7
  Top Layer w7: U4.3 755,1175 ; v1@757,1072 C16.2 R9.1 ; U1.57 1084.84,589.84 v1(1130,635)
  Bottom Layer w7: v1(755,1070) 776.01,1070 1103.75,742.25 1103.75,661.25 v1(1130,635)
PB6-SCL-X9: J3.17 J3.18 R4.2 U1.58 U4.6 | length 2193.2
  Top Layer w7: U4.6 535.63,1214.37 530,1220 530,1240 540,1250 669.8,1250 699.97,1280.17 699.97,1426.58 728.39,1455 985,1455 J3.17 ; R4.2 1095,425 1104.53,434.53 U1.58
  Bottom Layer w7: J3.17 J3.18 1131,1319 1131,1034.2 1294.25,870.95 1294.25,660.25 1090,456.01 v1(1090,435)
PB7-SDA-X10: J3.19 J3.20 R5.2 U1.59 U4.7 | length 2318.6
  Top Layer w7: U4.7 535.31,1194.68 516,1214 516,1245.8 534.2,1264 664,1264 685.97,1285.97 685.97,1432.38 722.59,1469 899,1469 J3.19 ; R5.2@1124.21,388.79 U1.59
  Bottom Layer w7: J3.19 J3.20 982.4,1367.6 1062.6,1367.6 1117,1313.2 1117,1028.4 1280.25,865.15 1280.25,666.05 1063.75,449.56 1063.75,424.13 1079.13,408.75 1108.75,408.75 v1(1135,435)
PB8-Y3: J2.5 J2.6 U1.61 | length 909
  Top Layer w7: U1.61 1163.58,463.34 1189.5,437.42 1189.5,365.5 1240,315 1380.2,315 1640,55.2 J2.5
  Bottom Layer w7: J2.6 J2.5
PB9-Y4: J2.7 J2.8 U1.62 | length 1105.2
  Top Layer w7: U1.62 1183.27,463.45 1203.5,443.22 1203.5,371.3 1245.8,329 1386,329 1680.03,34.97 1680.03,-14.97 1664.97,-30.03 1580.03,-30.03 J2.7
  Bottom Layer w7: J2.8 J2.7
PB10-Y9: J2.17 J2.18 R6.2 U1.29 | length 1701.7
  Top Layer w7: U1.29 986.42,1076.42 990,1080 v1(990,1100) R6.2 ; J2.18 J2.17
  Bottom Layer w7: v1(990,1100) 1035,1145 1080,1145 1103,1122 1103,1022.6 1266.25,859.36 1266.25,671.85 1006,411.6 1006,265.52 1018.25,253.27 1018.25,68.45 1005,55.2 1005,45 J2.17
PB11-Y10: J2.19 J2.20 R7.2 U1.30 | length 1733
  Top Layer w7: J2.20 J2.19 ; R7.2 v1(960,1070) 960,1045 966.73,1038.27 U1.30
  Bottom Layer w7: J2.19 1004.25,74.25 1004.25,247.47 992,259.72 992,417.4 1252.25,677.65 1252.25,853.56 1089,1016.8 1089,1116.2 1074.2,1131 1041,1131 1030,1120 1030,1102.88 997.12,1070 v1(960,1070)
PB12-Y5: J2.9 J2.10 R8.2 U1.33 U3.1 | length 1902.9
  Top Layer w7: R8.2 745,935 775,935 802.36,907.64 U1.33 ; v1(950,225) 975,225 1037.31,287.31 1117.89,287.31 1290.2,115 U3.1 1400,115 1440,75 J2.9
  Bottom Layer w7: v1(770,935) 891.21,935 1089.75,736.45 1089.75,574.55 950,434.8 v1(950,225) ; J2.10 J2.9
PB13-Y6: J2.11 J2.12 U1.34 U3.6 | length 2301
  Top Layer w7: v1(480,820) 548.25,888.25 854.23,888.25 U1.34 ; v1(837.33,110) 857.33,90 1140,90 ; U3.6 1130,215 1140,205 1140,90 ; J2.11 1260,90 1140,90
  Bottom Layer w7: v1(480,820) 482.88,820 523.13,860.25 661.67,860.25 696,825.92 696,160 744.75,111.25 836.08,111.25 v1(837.33,110) ; J2.12 J2.11
PB14-Y7: J2.13 J2.14 R11.2 U1.35 | length 2372.5
  Top Layer w7: v1(520,820) 574.25,874.25 795.35,874.25 801.33,868.27 U1.35 ; v1(800,85) 809,76 1224,76 1240,60 J2.13 ; J2.14 J2.13 ; R11.2 1480.03,91.97 1480.03,-9.97 1459.97,-30.03 1280.03,-30.03 J2.13
  Bottom Layer w7: v1(520,820) 522.88,820 549.13,846.25 655.87,846.25 682,820.12 682,154.2 738.95,97.25 787.75,97.25 v1(800,85)
PB15-Y8: J2.15 J2.16 U1.36 U3.5 | length 2274.4
  Top Layer w7: v1(560,820) 555,820 595.25,860.25 789.55,860.25 801.22,848.58 U1.36 ; U3.5 1120.4,265 1170,215.4 v1(1170,140) ; J2.16 J2.15
  Bottom Layer w7: v1(560,820) 640,740 640,75.06 599.97,35.03 599.97,-24.97 624.97,-49.97 669.97,-49.97 690,-70 690,-113.04 706.98,-130.03 1099.97,-130.03 J2.16 ; J2.15 1140,110 v1(1170,140)
PC0-X19: J3.29 J3.30 U1.8 | length 1360
  Top Layer w7: J3.30 J3.29 ; v1(1160,725) 1167.12,725 1192.28,750.16 U1.8
  Bottom Layer w7: J3.30 483,1367 558.2,1367 1081.4,843.8 1171.2,843.8 1196.25,818.75 1196.25,754.13 1167.12,725 v1(1160,725)
PC1-X20: J3.31 J3.32 U1.9 | length 1361.2
  Top Layer w7: J3.32 J3.31 ; v1@1174.84,769.84 U1.9
  Bottom Layer w7: J3.32 397,1353 552.4,1353 1075.6,829.8 1165.2,829.8 1180,815 1180,775 v1(1170,765)
PC2-X21: J3.33 J3.34 U1.10 | length 1413.5
  Top Layer w7: J3.34 J3.33 ; v1(1150,800) 1151.25,801.25 1190.87,801.25 1202.59,789.53 U1.10
  Bottom Layer w7: J3.34 311,1339 546.6,1339 1069.8,815.8 1134.2,815.8 v1(1150,800)
PC3-X22: J3.35 J3.36 U1.11 | length 1550.4
  Top Layer w7: J3.36 J3.35 ; v1(1110,785) 1110,800 1140,830 1195,830 1215.79,809.21 U1.11
  Bottom Layer w7: J3.36 225,1325 540.8,1325 1080.8,785 v1(1110,785)
PC4-X11: J3.21 J3.22 U1.24 | length 745.1
  Top Layer w7: J3.22 886,1364 1051,1364 1106,1309 1106,1051.2 1084.84,1030.04 U1.24
  Bottom Layer w7: J3.22 J3.21
PC5-X12: J3.23 J3.24 U1.25 | length 830.1
  Top Layer w7: J3.24 800,1350 1045.2,1350 1092,1303.2 1092,1057 1065.16,1030.16 U1.25
  Bottom Layer w7: J3.24 J3.23
PC6-Y1: J2.1 J2.2 U1.37 | length 2488.3
  Top Layer w7: v1(600,820) 626.25,846.25 783.75,846.25 801.1,828.9 U1.37 ; J2.2 J2.1
  Bottom Layer w7: v1(600,820) 654,766 654,61.2 681,34.2 681,-10.8 719.2,-49 1274,-49 1290,-65 1290,-110 1310.03,-130.03 1799.97,-130.03 J2.2
PC7-Y2: J2.3 J2.4 U1.38 | length 2301.2
  Top Layer w7: v1(645,820) 780,820 790.79,809.21 U1.38 ; J2.4 J2.3
  Bottom Layer w7: v1(645,820) 645,794.8 668,771.8 668,67 695,40 695,-5 725,-35 1275,-35 1290,-20 1290,35 1305.03,50.03 1699.97,50.03 J2.3
PC8-SDIO_D0: J6.7 U1.39 | length 982
  Top Layer w7: J6.7 301.26,1146.26 278,1123 278,846.6 335.07,789.53 U1.39
PC9-SDIO_D1: J6.8 U1.40 | length 1057.7
  Top Layer w7: J6.8 299.57,1189.57 264,1154 264,840.8 329.27,775.53 779.47,775.53 785.16,769.84 U1.40
PC10-SDIO_D2: J6.1 U1.51 | length 782.7
  Top Layer w7: J6.1 433.58,886.42 v1(445,875) ; v1(960,625) 966.73,618.27 U1.51
  Bottom Layer w7: v1(445,875) 666.72,875 873.72,668 917,668 v1(960,625)
PC11-SDIO_D3: J6.2 R12.1 U1.52 | length 999.4
  Top Layer w7: J6.2 435.28,929.72 v1(445,920) ; R12.1 965,445 986.42,466.42 U1.52 v1@986.42,653.58
  Bottom Layer w7: v1(445,920) 495,920 526,889 672.52,889 879.52,682 958,682 v1(985,655)
PC12-SDIO_CK: J6.5 U1.53 | length 1119.2
  Top Layer w7: v1(310,1055) 314.65,1059.65 J6.5@378.82,1059.65 ; U1.53 1006.1,638.98 1015,647.88 v1(1015,680)
  Bottom Layer w7: v1(310,1055) 310,980 341.25,948.75 486.25,948.75 532,903 678.32,903 885.32,696 999,696 v1(1015,680)
PC13-X18: J3.27 J3.28 U1.2 | length 1860.9
  Top Layer w7: J3.28 J3.27 ; U1.2 1397.95,632.05 v1(1405,625)
  Bottom Layer w7: J3.27 580.03,1550.03 1064.97,1550.03 1080.03,1534.97 1080.03,1389.77 1145,1324.8 1145,1040 1308.25,876.75 1308.25,651.75 1335,625 v1(1405,625)
PD2-SDIO_CMD: J6.3 U1.54 | length 943.3
  Top Layer w7: J6.3 v1@435,973.03 ; U1.54 1025.79,635.79 1041.25,651.25 1041.25,708.75 v1(1040,710)
  Bottom Layer w7: v1(445,975) 479.8,975 537.8,917 684.11,917 891.11,710 v1(1040,710)
RST#: C13.2 R15.1 SW2.2 U1.7 | length 1280
  Top Layer w6: U1.7 1398.96,730.47 1455,786.51 1455,835 1472.87,852.87 1955,852.87 1985,882.87 1985,935 1965,955 1915,955 1900,970 1900,1091.61 SW2.2
  Top Layer w10: C13.2 R15.1 1926.57,1173 SW2.2
VBAT: C6.1 D1.2 J1.4 U1.1 | length 907.2
  Top Layer w7: U1.1 1362.64,612.36 1455,520 1776.53,520 1804.97,548.44 1804.97,769.97 J1.4 ; C6.1 1645.47,519.53
VBUS: CN1.1 D6.1 J2.35 R20.2 | length 620.5
  Top Layer w15: J2.35 140,125 ; 140,125.15 140,125 ; R20.2@187.56,335.43 155.43,335.43 147.61,327.61 49.19,327.61 34.52,312.94 34.52,150 59.52,125 140,125 ; D6.1 165,150 140,125
VIN: D1.1 D6.2 D7.2 J1.1 R1.1 | length 2884
  Top Layer w7: D1.1@1898,574.54 R1.1
  Top Layer w15: D6.2@290,150 290,-105 330,-145 547.22,-145 547.47,-144.75 572.53,-144.75 572.78,-145 1855,-145 1885,-115 1885,0 v1(1945,60) ; R1.1 1945,672 J1.1
  Bottom Layer w15: v1(1945,60) J1.1
VIN1: D7.1 J2.36 | length 222.3
  Top Layer w15: J2.36 193.82,-36.18 D7.1
VIN2: C19.2 J1.2 R1.2 U2.3 | length 631.9
  Top Layer w15: U2.3@1664,1029.71 C19.2 ; J1.2 1845,642 R1.2
  Bottom Layer w15: v1(1665,1075) 1665,890 J1.2
pads on no net: SW1.@2015,171.54 SW1.@2015,238.46 SW2.@2015,1178.07 SW2.@2015,1245
copper on no net: | length 147.4
  Top Layer w7.87: 1968.5,1496.06 2024.75,1439.82 2024.75,1372
  other v2: -39.57,854.92 -39.57,1169.88

## Polygon pours and split planes (outlines as drawn)
GND on Bottom Layer "Bottom Layer-No Net" (solid, remove dead copper, pour order 2): -78.74,1574.8 -78.74,-157.48 2047.24,-157.48 2047.24,1574.8
GND on Top Layer "Bottom Layer-No Net" (solid, remove dead copper, pour order 4): -78.74,-157.48 2047.24,-157.48 2047.24,1574.8 -78.74,1574.8

## Keep-outs
Keep-Out Layer:
  the board outline again, w7.87

## Silkscreen, mask and mechanical layers (free items; w line width, h text height)
Top Overlay:
  drawing of 1211 lines, arcs and shapes, not listed
  text "RST" at 1865,1145 h78.74 r90
  text "GND" at 1775,965 h47.24 r90
  text "GND" at 2040,965 h47.24 r90
  text "3V3" at 1775,870 h47.24 r90
  text "3V3" at 2040,870 h47.24 r90
  text "BT0" at 2040,775 h47.24 r90
  text "VBat" at 1775,755 h47.24 r90
  text "Vi" at 2040,690 h47.24 r90
  text "Vi'" at 1775,680 h47.24 r90
  text "pyboardCN V2" at 1395,550 h80 r90
  text "SW" at 1873,160.08 h78.74 r90
Bottom Overlay:
  drawing of 3510 lines, arcs and shapes, not listed
  text "22" at 105,1480 h59.06 r180
  text "21" at 205,1480 h59.06 r180
  text "20" at 305,1480 h59.06 r180
  text "19" at 405,1480 h59.06 r180
  text "18" at 505,1480 h59.06 r180
  text "17" at 605,1480 h59.06 r180
  text "12" at 705,1480 h59.06 r180
  text "11" at 805,1480 h59.06 r180
  text "10" at 905,1480 h59.06 r180
  text "9" at 1005,1480 h59.06 r180
  text "8" at 1105,1480 h59.06 r180
  text "7" at 1205,1480 h59.06 r180
  text "6" at 1305,1480 h59.06 r180
  text "5" at 1405,1480 h59.06 r180
  text "4" at 1505,1480 h59.06 r180
  text "3" at 1605,1480 h59.06 r180
  text "2" at 1705,1480 h59.06 r180
  text "1" at 1805,1480 h59.06 r180
  text "-X" at 1850,1480 h59.06 r180
  text "C3" at 160,1355 h59.06 r90
  text "C2" at 260,1355 h59.06 r90
  text "C1" at 360,1355 h59.06 r90
  text "C0" at 460,1355 h59.06 r90
  text "C13" at 560,1355 h59.06 r90
  text "B3" at 640,1355 h59.06 r90
  text "C5" at 760,1355 h59.06 r90
  text "C4" at 860,1355 h59.06 r90
  text "B7" at 960,1355 h59.06 r90
  text "B6" at 1060,1355 h59.06 r90
  text "A7" at 1160,1355 h59.06 r90
  text "A6" at 1260,1355 h59.06 r90
  text "A5" at 1360,1355 h59.06 r90
  text "A4" at 1460,1355 h59.06 r90
  text "A3" at 1560,1355 h59.06 r90
  text "A2" at 1660,1355 h59.06 r90
  text "A1" at 1760,1355 h59.06 r90
  text "A0" at 1860,1355 h59.06 r90
  text "TX1" at 1260,1160 h59.06 r90
  text "TX2" at 1400,1160 h59.06 r90
  text "RX2" at 1465,1160 h59.06 r90
  text "TX3" at 1535,1160 h59.06 r90
  text "RX3" at 1605,1160 h59.06 r90
  text "TX4" at 1675,1160 h59.06 r90
  text "RX4" at 1745,1160 h59.06 r90
  text "RX1" at 1330,1155 h59.06 r90
  text "B6" at 1260,995 h59.06 r90
  text "B7" at 1330,995 h59.06 r90
  text "A2" at 1400,995 h59.06 r90
  text "A3" at 1465,995 h59.06 r90
  text "B10" at 1535,995 h59.06 r90
  text "B11" at 1605,995 h59.06 r90
  text "A0" at 1675,995 h59.06 r90
  text "A1" at 1745,995 h59.06 r90
  text "TX6" at 1260,860 h59.06 r90
  text "RX6" at 1330,860 h59.06 r90
  text "SCK1" at 1395,860 h59.06 r90
  text "MI1" at 1465,860 h59.06 r90
  text "MO1" at 1535,860 h59.06 r90
  text "SCK2" at 1605,860 h59.06 r90
  text "MI2" at 1675,860 h59.06 r90
  text "MO2" at 1745,860 h59.06 r90
  text "C6" at 1260,695 h59.06 r90
  text "C7" at 1330,695 h59.06 r90
  text "A5" at 1395,695 h59.06 r90
  text "A6" at 1465,695 h59.06 r90
  text "A7" at 1535,695 h59.06 r90
  text "B13" at 1605,695 h59.06 r90
  text "B14" at 1675,695 h59.06 r90
  text "B15" at 1745,695 h59.06 r90
  text "SDA1" at 1260,560 h59.06 r90
  text "SCL1" at 1330,560 h59.06 r90
  text "SDA2" at 1400,560 h59.06 r90
  text "SCL2" at 1470,560 h59.06 r90
  text "DAC1" at 1535,560 h59.06 r90
  text "DAC2" at 1605,560 h59.06 r90
  text "ADC" at 1675,560 h59.06 r90
  text "PWM" at 1745,560 h59.06 r90
  text "B7" at 1260,395 h59.06 r90
  text "B6" at 1330,395 h59.06 r90
  text "B11" at 1400,395 h59.06 r90
  text "B10" at 1470,395 h59.06 r90
  text "A4" at 1535,395 h59.06 r90
  text "A5" at 1605,395 h59.06 r90
  text "A0-7" at 1675,395 h59.06 r90
  text "C" at 1745,395 h59.06 r90
  text "VBUS" at 160,215 h59.06 r90
  text "GND" at 260,180 h59.06 r90
  text "A13" at 360,165 h59.06 r90
  text "A14" at 460,165 h59.06 r90
  text "A15" at 560,165 h59.06 r90
  text "B11" at 960,160 h59.06 r90
  text "B10" at 1060,160 h59.06 r90
  text "B15" at 1155,160 h59.06 r90
  text "B14" at 1260,160 h59.06 r90
  text "B13" at 1360,160 h59.06 r90
  text "B12" at 1460,160 h59.06 r90
  text "B4" at 660,130 h59.06 r90
  text "B1" at 760,130 h59.06 r90
  text "B0" at 890,130 h59.06 r90
  text "B9" at 1560,130 h59.06 r90
  text "B8" at 1660,130 h59.06 r90
  text "C7" at 1760,130 h59.06 r90
  text "C6" at 1860,130 h59.06 r90
  text "Vi" at 130,-60 h59.06
  text "G" at 230,-60 h59.06
  text "16" at 360,-60 h59.06
  text "15" at 460,-60 h59.06
  text "14" at 570,-60 h59.06
  text "13" at 660,-60 h59.06
  text "12" at 760,-60 h59.06
  text "11" at 860,-60 h59.06
  text "10" at 960,-60 h59.06
  text "9" at 1030,-60 h59.06
  text "8" at 1130,-60 h59.06
  text "7" at 1230,-60 h59.06
  text "6" at 1330,-60 h59.06
  text "5" at 1430,-60 h59.06
  text "4" at 1530,-60 h59.06
  text "3" at 1630,-60 h59.06
  text "2" at 1730,-60 h59.06
  text "1" at 1830,-60 h59.06
  text "Y-" at 1900,-60 h59.06
Top Solder:
  drawing of 5394 lines, arcs and shapes, not listed
  text "IoT" at 845,335 h50 r90
Bottom Solder:
  text "www.micropython.com.cn" at 2030,1080 h70.87 r90
Mechanical 1:
  lines w6: 1993.75,1366 1993.75,1378 ; 2019.75,1366 2019.75,1378 ; 1988.75,1365 2024.75,1365 2024.75,1379 1988.75,1379 1988.75,1365
Mechanical 16:
  lines w1: 1981.75,1372 2031.75,1372 ; 2006.75,1357 2006.75,1397